# Altium PCB power_2023-07-21.pcbdoc
Units mil, origin at the board's own origin, x right, y up, seen from the top; angles counter-clockwise.
Board outline 2965 x 2770 mil, 2 copper layers (Top Layer, Bottom Layer); 54 components, 28 nets, 150 pads, 197 vias.
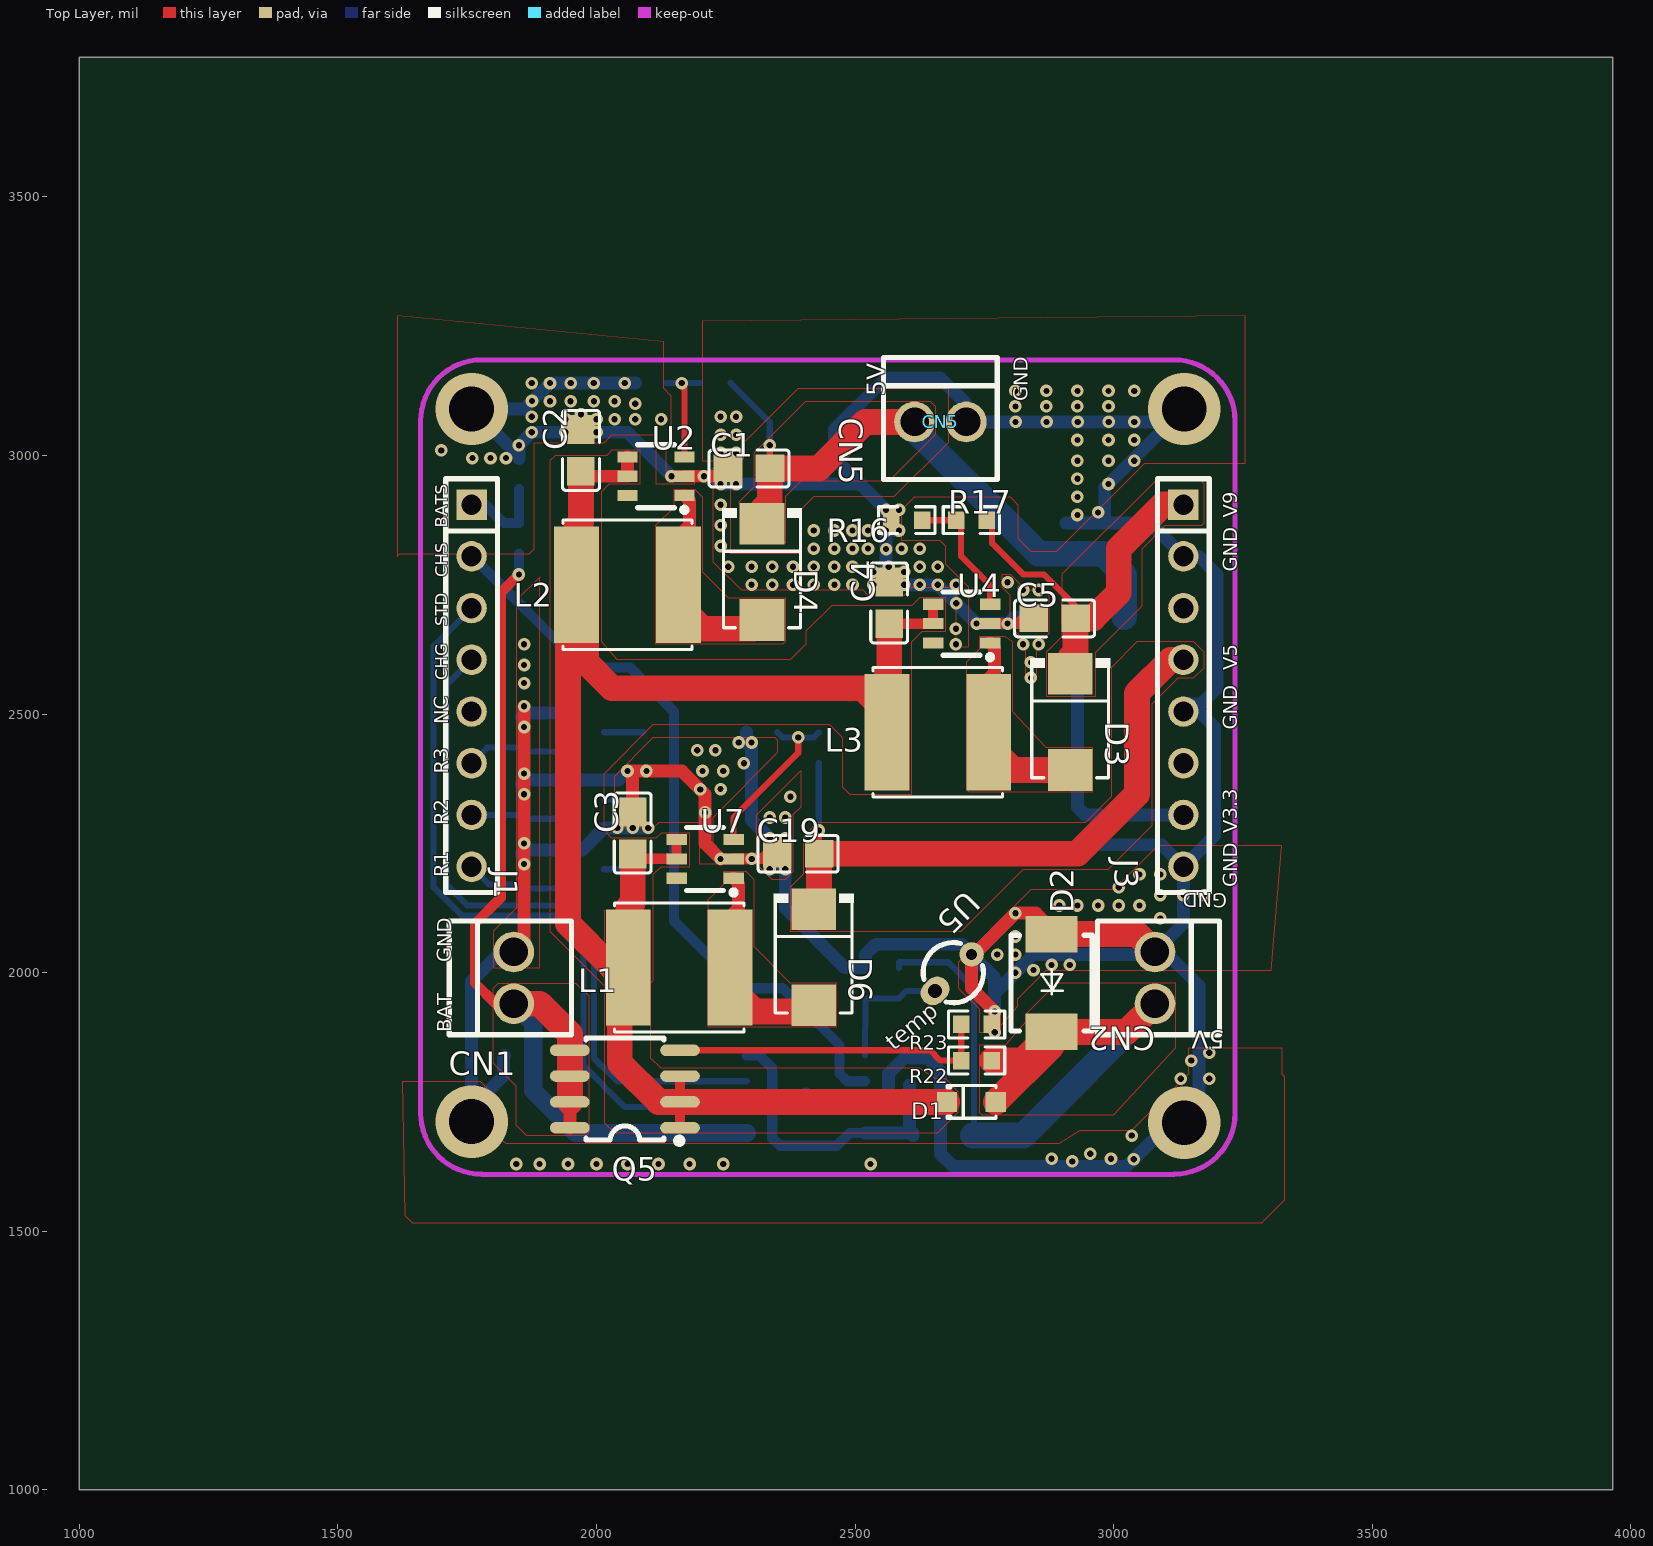
[diagram p0: Top Layer view]
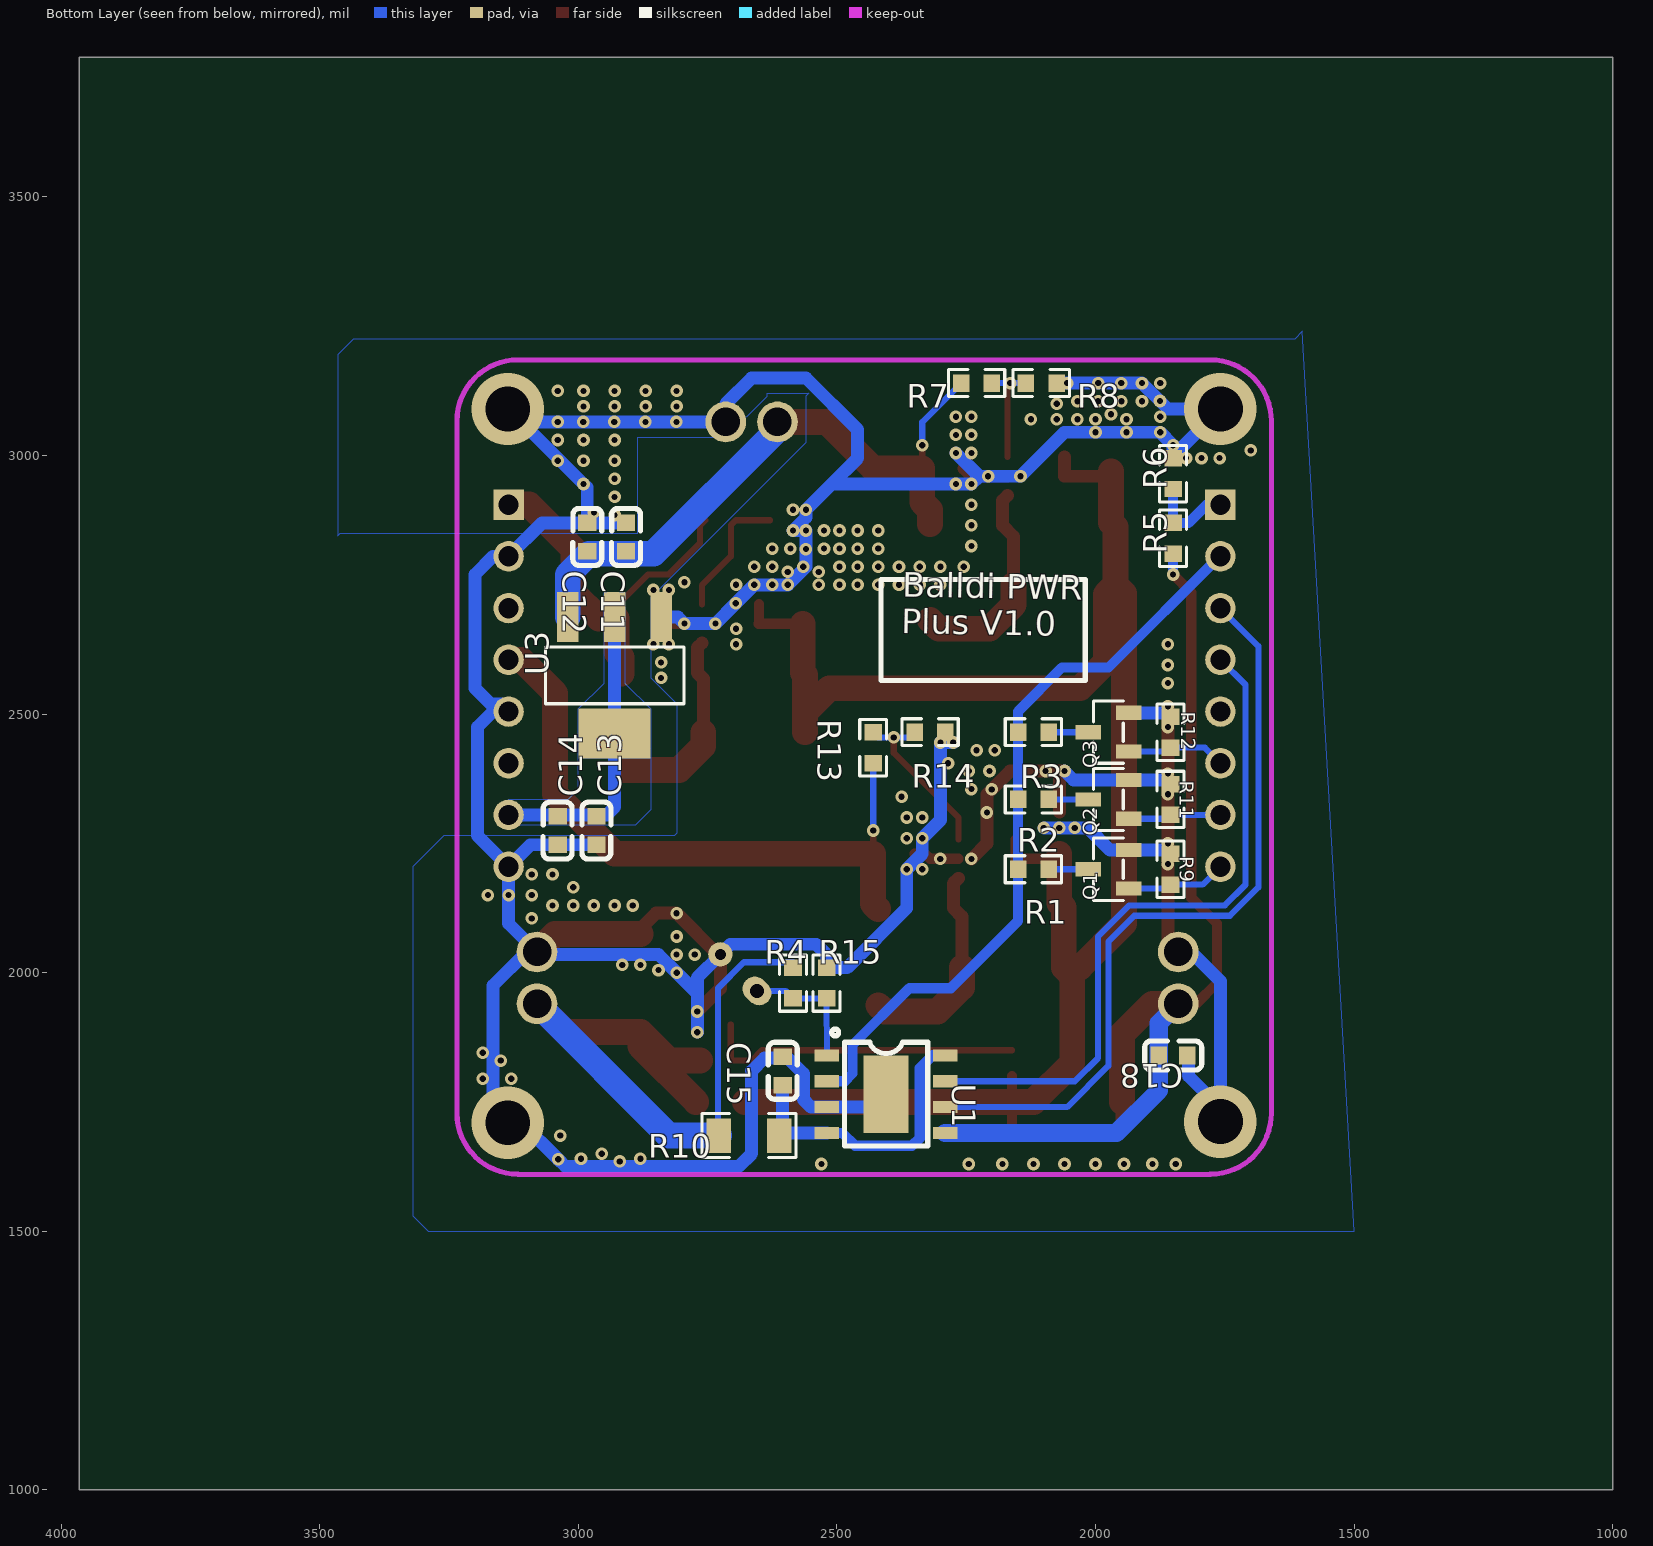
[diagram p1: Bottom Layer view, seen from below]

## Layer stack, top to bottom
Top Layer: signal copper (thickness not stored)
Dielectric: dielectric 12.6, FR-4, Dk 4.8
Bottom Layer: signal copper (thickness not stored)

## Board outline
3965,1000 1000,1000 1000,3770 3965,3770

## Components (designator, comment, footprint, x,y, rotation, side; value= is the part's Value field where it differs from the comment)
C1 "22uF" C0805 2295,2975 r180 top
C2 "22uF" C0805 1970,3010 r90 top
C3 "22uF" C0805 2070,2270 r90 top
C4 "22uF" C0805 2566,2715 r90 top
C5 "22uF" C0805 2886,2685 r180 top
C11 "106" C0603 2907.91,2842.3 r90 bottom
C12 "104" C0603 2982.91,2842.3 r90 bottom
C13 "104" C0603 2965,2275 r270 bottom
C14 "106" C0603 3040,2275 r270 bottom
C15 "106" C0603 2605,1810 r90 bottom
C18 "106" C0603 1850,1840 r180 bottom
C19 "22uF" C0805 2390,2230 r180 top
CN1 "640454-2" CONN-TH_640454-2 1840,1990 r270 top
CN2 "640454-2" CONN-TH_640454-2 3080,1990 r90 top
CN5 "640454-2" CONN-TH_640454-2 2665,3065 r180 top
D1 "BAT60AE6327" SOD-323_L1.8-W1.3-LS2.5-FD 2725,1750 r180 top
D2 "SMBJ5.0A_C10204" SMB_L4.6-W3.6-LS5.3-R-RD 2880,1980 r90 top
D3 "SS34BG" SMB_L4.6-W3.6-LS5.3-RD 2916,2485 r270 top
D4 "SS34BG" SMB_L4.6-W3.6-LS5.3-RD 2320,2775 r270 top
D6 "SS34BG" SMB_L4.6-W3.6-LS5.3-RD 2420,2030 r270 top
J1 "Header2.54mm 1*8P" HDR-TH_8P-P2.54-V-M 1758.42,2555 r270 top
J3 "Header2.54mm 1*8P" HDR-TH_8P-P2.54-V-M 3135,2555 r270 top
L1 "22uH" IND-SMD_L6.0-W6.0 2160,2010 r0 top
L2 "22uH" IND-SMD_L6.0-W6.0 2060,2750 r0 top
L3 "22uH" IND-SMD_L6.0-W6.0 2660,2465 r0 top
Q1 "2N7002-TP" SOT-23-3_L2.9-W1.3-P1.90-LS2.4-BR 1975,2200 r0 bottom
Q2 "2N7002-TP" SOT-23-3_L2.9-W1.3-P1.90-LS2.4-BR 1975,2335 r0 bottom
Q3 "2N7002-TP" SOT-23-3_L2.9-W1.3-P1.90-LS2.4-BR 1975,2465 r0 bottom
Q5 "AO4485" SOIC-8_L5.0-W4.0-P1.27-LS6.0-BL 2055,1775 r90 top
R1 "2K" R0603#1 2120,2200 r0 bottom
R2 "5K1" R0603#1 2120,2335 r0 bottom
R3 "10K" R0603#1 2120,2465 r0 bottom
R4 "2.7K" R0603#1 2585,1980 r90 bottom
R5 "10K" R0603#1 1850,2840 r270 bottom
R6 "20K" R0603#1 1850,2965 r270 bottom
R7 "75K" R0603#1 2230,3140 r180 bottom
R8 "10K" R0603#1 2105,3140 r0 bottom
R9 "10K" R0603#1 1855,2200 r270 bottom
R10 "0.4" R1206 2670,1685 r0 bottom
R11 "10K" R0603#1 1855,2335 r270 bottom
R12 "10K" R0603#1 1855,2465 r270 bottom
R13 "75" R0603#1 2430,2435 r90 bottom
R14 "10K" R0603#1 2320,2465 r0 bottom
R15 "16K" R0603#1 2520,1980 r270 bottom
R16 "10K" R0603#2 2600,2875 r180 top
R17 "191K" R0603#2 2725,2875 r0 top
R22 "10K" R0603#2 2735,1830 r180 top
R23 "33K" R0603#2 2735,1900 r0 top
U1 "TP4056" ESOP-8_L4.9-W3.9-P1.27-LS6.0-BL-EP 2405,1765 r90 bottom
U2 "SX1308" SOT-23-6_L2.9-W1.6-P0.95-LS2.8-BR 2115,2960 r0 top
U3 "BL9110-330BPFB" SOT-223_L6.5-W3.5-P2.30-LS7.0-BR 2930,2575 r270 bottom
U4 "SX1308" SOT-23-6_L2.9-W1.6-P0.95-LS2.8-BR 2706,2675 r0 top
U5 "NTC/10K" RES-TH_BD2.8_NTC-10K 2690,2000 r225 top
U7 "SX1308" SOT-23-6_L2.9-W1.6-P0.95-LS2.8-BR 2210,2220 r0 top

## Footprints (in the part's own frame and the unit in brackets; to place one, negate y for a bottom-side part, rotate by r counter-clockwise, add the part's x,y. Pads: shape width x height; smd on the part's side, far side on the other; paste and mask are expansions set on the pad)
C0603 [mm]
  rect 0.8x0.9 smd paste+0 mask+0.051: 1(0.7,0) 2(-0.7,0)
  silkscreen extent -1.39,-0.72 1.41,0.71
C0805 [mm]
  rect 1.41x1.35 smd paste-100 mask+0.051: 1(-1.03,0) 2(1.03,0)
  silkscreen extent -1.96,-0.9 1.96,0.9
CONN-TH_640454-2 [mm]
  round 2 hole 1.4 paste+0 mask+0.051: 1(-1.27,0) 2(1.27,0)
  silkscreen extent -2.79,-3.17 2.79,2.83
ESOP-8_L4.9-W3.9-P1.27-LS6.0-BL-EP [mm]
  rect 0.6x1.2 smd paste+0 mask+0.051: 1(1.905,2.908) 2(0.635,2.908) 3(-0.635,2.908) 4(-1.905,2.908) 5(-1.905,-2.908) 6(-0.635,-2.908) 7(0.635,-2.908) 8(1.905,-2.908)
  rect 3.8x2.2 smd paste+0 mask+0.051: 9(0,0)
  silkscreen extent -2.55,-2.05 3.2,2.67
HDR-TH_8P-P2.54-V-M [mm]
  rect 1.5x1.5 hole 1 paste+0 mask+0.051: 1(-8.89,0)
  round 1.5 hole 1 paste+0 mask+0.051: 2(-6.35,0) 3(-3.81,0) 4(-1.27,0) 5(1.27,0) 6(3.81,0) 7(6.35,0) 8(8.89,0)
  silkscreen extent -10.16,-1.27 10.16,1.27
IND-SMD_L6.0-W6.0 [mm]
  rect 2.2x5.72 smd paste+0 mask+0.051: 1(-2.5,0) 2(2.5,0)
  silkscreen extent -3.18,-3.18 3.18,3.18
R0603#1 [mil]
  rect 31.75x34.02 smd paste-3937.01 mask+2: 1(29.66,0) 2(-29.66,0)
  silkscreen extent -55,-26 55,26
R0603#2 [mil]
  rect 31.75x34.02 smd paste-3937.01 mask+2: 1(-29.66,0) 2(29.66,0)
  silkscreen extent -55,-26 55,26
R1206 [mil]
  rect 47.54x66.97 smd paste-3937.01 mask+2: 1(58.22,0) 2(-58.22,0)
  silkscreen extent -91,-42 91,42
RES-TH_BD2.8_NTC-10K [mm]
  round 1.2 hole 0.55 paste+0 mask+0.05: 1(-1.27,0)
  oval 1.5x1.2 hole 0.7 paste+0 mask+0.05: 2(1.27,0)
  silkscreen extent -1.27,-1.48 1.27,1.48
SMB_L4.6-W3.6-LS5.3-R-RD [mm]
  rect 1.8x2.54 smd paste+0 mask+0.051: 1(2.4,0) 2(-2.4,0)
  silkscreen extent -2.35,-2 2.35,2
SMB_L4.6-W3.6-LS5.3-RD [mil]
  rect 80.61x86.31 smd paste+0 mask+2: 1(-92.94,0) 2(92.94,0)
  silkscreen extent -123,-77 108,77
SOD-323_L1.8-W1.3-LS2.5-FD [mm]
  rect 1x1 smd paste+0 mask+0.051: 1(-1.2,0) 2(1.2,0)
  silkscreen extent -1.2,-0.8 1.2,0.8
SOIC-8_L5.0-W4.0-P1.27-LS6.0-BL [mil]
  oval 22.38x76.78 smd paste+0 mask+2: 1(-75,-106.5) 2(-25,-106.5) 3(25,-106.5) 4(75,-106.5) 5(75,106.5) 6(25,106.5) 7(-25,106.5) 8(-75,106.5)
  silkscreen extent -106,-111 98,75
SOT-23-3_L2.9-W1.3-P1.90-LS2.4-BR [mm]
  rect 1.25x0.7 smd paste+0 mask+0.051: 1(-1,0.95) 2(-1,-0.95) 3(1,0)
  silkscreen extent -0.73,-1.53 0.73,1.53
SOT-23-6_L2.9-W1.6-P0.95-LS2.8-BR [mm]
  rect 1x0.55 smd paste+0 mask+0.051: 1(1.4,-0.95) 2(1.4,0) 3(1.4,0.95) 4(-1.4,0.95) 5(-1.4,0) 6(-1.4,-0.95)
  silkscreen extent -0.9,-1.78 1.52,1.55
SOT-223_L6.5-W3.5-P2.30-LS7.0-BR [mm]
  rect 2.465x1.05 smd paste+0 mask+0.051: 1(-2.857,2.3) 2(-2.857,0) 3(-2.858,-2.3)
  rect 2.465x3.54 smd paste+0 mask+0.051: 4(2.857,0)
  silkscreen extent -1.4,-3.4 1.4,3.4

## Via types
v1: diameter 24.41, hole 12, Top Layer to Bottom Layer, tented both sides, 193 vias
v2: diameter 140, hole 86.61, Top Layer to Bottom Layer, tented both sides, 4 vias

## Nets (pads, with @x,y where several pads share a name; then routed paths per layer and width w, separated by ;. In a path a pad name is that pad's centre, name@x,y a point inside that pad or via, vN(x,y) a via of type N, cw(c..) or ccw(c..) an arc to the next point about the centre after c; other vN are vias at no path point)
BAT3.7: C18.2 CN1.2 Q5.5 Q5.6 Q5.7 Q5.8 R5.1 U1.5 | length 1901.5
  Top Layer w19.68: CN1.2 1805,1940 1765,1980 1765,2095 1815,2145 1815,2735 v1(1850,2770)
  Top Layer w25: Q5.8 Q5.7
  Top Layer w50: CN1.2 1890,1940 1948.5,1881.5 Q5.7
  Bottom Layer w19.68: v1(1850,2770) R5.1
  Bottom Layer w35.43: CN1.2 1877.56,1902.44 C18.2 ; C18.2 1877.6,1772.4 1960,1690 U1.5
BAT_SAMPLE: J1.1 R5.2 R6.1 | length 171.8
  Bottom Layer w19.68: J1.1 1785,2905 1820,2870 R5.2 ; R5.2 R6.1
CHRG1: J1.4 U1.7 | length 1330.6
  Bottom Layer w12.01: J1.4 1710,2556.6 1710,2170 1750,2130 1935,2130 1995,2070 1995,1835 2040,1790 U1.7
CHRG_SAMPLE: J1.2 R1.1 R2.1 R3.1 U1.2 | length 1451
  Bottom Layer w19.68: J1.2 1760,2805 1975,2590 2065,2590 2149.7,2505.3 R3.1 ; R1.1 R3.1 ; R1.1 2149.7,2100.3 2280,1970 2360,1970 2470,1860 2470,1805 2485,1790 U1.2
GND: C1.2 C2.2 C3.2 C4.2 C5.2 C11.1 C12.1 C13.1 C14.1 C15.1 C18.1 C19.2 CN1.1 CN2.2 CN5.1 D2.1 J3.2 J3.5 J3.8 Q1.2 Q2.2 Q3.2 R6.2 R8.2 R9.2 R11.2 R12.2 R14.2 R15.2 R16.2 R23.2 U1.3 U1.9 U2.2 U3.1 U4.2 U5.1 U7.2 | length 10161.7
  Top Layer w20: U7.2 v1(2300.3,2220) 2320,2220 2330,2230 C19.2 ; U4.2 v1(2795,2675) 2815,2675 2825,2685 C5.2@2845.45,2685
  Top Layer w25: CN1.1 1860,2060 v1(1860,2210) v1(1860,2515) ; C3.2 2070,2380 v1(2060,2390) v1(2096.45,2390) 2134.59,2390 2165,2390 v1(2200.65,2354.35) 2210,2345 v1(2210,2309.78) 2210,2250 v1(2240,2220) ; U2.2 v1(2207.63,2960) 2239.45,2960 C1.2 ; v1(2770,1885) v1(2770,1925) 2725.36,1969.64 U5.1 2730.35,2035.35 v1(2810,2115) 2850,2115 2880,2085 D2.1
  Top Layer w50: D2.1 3045.52,2074.49 CN2.2
  Bottom Layer w25: v2@1758.4,1712.1 1758.4,1983.4 1815,2040 CN1.1 ; v2(1758.43,1712.05) 1758.43,1738.43 1820,1800 1820,1837.56 C18.1 ; R9.2 1862.74,2237.4 Q1.2 1972.4,2237.4 2015,2280 v1(2100,2280) ; R11.2 1862.74,2372.4 Q2.2 2042.4,2372.4 v1(2060,2390) ; R12.2 1862.74,2502.4 Q3.2 ; R8.2 v1(2054.58,3140) v1(1994.58,3140) v1(1950.3,3140) v1(1910,3140) v1(1875.35,3105.35) 1860,3090 v2(1758.43,3090) 1850,2998.43 R6.2 v1(1850,3020) v1(1875,3045) v1(2000,3045) 2060,3045 v1(2145,2960) 2225,2960 ; v1(2207.63,2960) 2225,2960 ; v1(2270,3005) 2225,2960 ; v1(2275,2445) v1(2300,2445) ; R14.2 2290.34,2454.66 v1(2300,2445) ; U1.9 2430,1740 U1.3 2550,1740 2565,1755 2565,1805 2597.56,1837.56 C15.1 ; C15.1 2607.6,1835 2640,1835 2665,1810 2665,1650 2690,1625 3025,1625 v1(3039.12,1639.12) 3110,1710 v2(3136.38,1710) 3165,1738.62 3165,1975 3100,2040 CN2.2 ; U3.1 2807.5,2687.5 v1(2795,2675) v1(2735,2675) v1(2695.74,2714.26) v1(2660,2750) v1(2625,2750) v1(2595,2750) 2560,2785 v1(2560,2819) v1(2560,2855) v1(2585,2855) 2560,2880 v1(2560,2895) 2510,2945 ; C11.1 C12.1 ; C13.1 C14.1 3092.56,2247.44 J3.8 ; 2225,2960 v1(2240,2945) 2510,2945 ; v1(2300,2445) 2300,2295 v1(2335,2260) ; 2335,2230 v1(2335,2260) ; 2335,2230 v1(2365,2200) ; 2335,2230 v1(2335,2260) ; 2335,2230 v1(2365,2200) ; v1(2365,2200) 2365,2125 2480.34,2009.66 R15.2 2520,2035 2540,2055 2705.71,2055 U5.1 2770,1990.71 v1(2770,1885) 2770,1960 v1(2809.92,1999.92) 2845,2035 3075.01,2035 CN2.2 ; 2510,2945 2460,2995 2460,3050 2560,3150 2665,3150 2715,3100 CN5.1 2810.45,3065 2840.45,3065 2870.45,3065 2900.45,3065 2930.45,3065 2960.45,3065 2990.45,3065 3020.45,3065 v1(3040.07,3065) 3111.38,3065 v2(3136.38,3090) 3135,3090 v1(2990,2945) 2982.91,2937.91 C12.1 ; C12.1 3070.14,2869.86 J3.2 3165,2805 3200,2770 3200,2550 3170,2520 3150,2520 J3.5 3165,2505 3195,2475 3195,2265 J3.8 ; CN2.2 3135,2094.99 J3.8
  other v1: 1845,1630 1890,1630 1945,1630 2000,1630 2060,1630 2120,1630 2180,1630 2245,1630 2530,1630 2920,1635 2880,1640 2995,1640 2955,1650 3035,1685 3130,1795 3185,1795 3150,1830 3185,1845 2845,2005 2880,2015 2915,2015 2775,2035 2810,2035 2810,2070 3090,2105 2895,2130 2930,2130 2970,2130 3010,2130 3050,2130 3090,2150 3135,2150 3175,2150 3010,2165 3050,2190 3090,2190 2335,2200 1860,2250 2365,2260 2040,2280 2070,2280 2335,2300 2365,2300 2375,2340 1860,2345 2240,2355 1860,2385 2205,2390 2245,2390 2285,2405 2195,2430 2230,2430 1860,2475 1860,2560 2840,2570 1860,2595 2840,2600 1860,2635 2695,2635 2825,2635 2855,2635 2695,2665 2825,2740 2855,2740 2300,2750 2340,2750 2380,2750 2420,2750 2460,2750 2495,2750 2535,2750 2695,2750 2795,2755 2535,2775 2595,2775 2255,2785 2300,2785 2340,2785 2380,2785 2420,2785 2460,2785 2495,2785 2565,2785 2625,2785 2660,2785 2420,2820 2460,2820 2495,2820 2525,2820 2590,2820 2625,2820 2240,2825 2420,2855 2460,2855 2495,2855 2525,2855 2240,2865 2930,2885 2970,2890 2585,2895 2240,2905 2930,2920 2270,2945 2930,2955 2930,2990 2990,2990 3040,2990 1760,2995 1795,2995 1825,2995 2240,3005 1700,3010 2930,3030 2990,3030 3040,3030 2240,3040 2270,3040 1940,3045 2810.45,3065 2870.45,3065 2930.45,3065 2990.45,3065 1940,3070 2000,3070 2035,3070 2075,3070 2125,3070 1875,3075 2240,3075 2270,3075 1970,3080 2810,3095 2870,3095 2930,3095 2990,3095 2075,3100 1910,3105 1950,3105 1995,3105 2035,3105 2810,3125 2870,3125 2930,3125 2990,3125 3040,3125 1875,3140
L1_2: D6.2 L1.2 U7.1 | length 407.8
  Top Layer w25: L1.2 2258.42,2108.42 2275,2125 2275,2172.72 U7.1
  Top Layer w50: L1.2 2258.42,1971.58 2305,1925 2407.94,1925 D6.2
L2_2: D4.2 L2.2 U2.1 | length 412
  Top Layer w25: L2.2 2158.42,2843.42 2180,2865 2180,2912.72 U2.1
  Top Layer w50: L2.2 2158.42,2711.58 2205,2665 2302.94,2665 D4.2
L3_2: D3.2 L3.2 U4.1 | length 384.3
  Top Layer w25: L3.2 2758.42,2568.42 2770,2580 2770,2628.72 U4.1
  Top Layer w50: L3.2 2758.42,2438.64 2805,2392.06 D3.2
POWER_IN: C2.1 C3.1 C4.1 D1.2 L1.1 L2.1 L3.1 Q5.1 Q5.2 Q5.3 U2.4 U2.5 U4.4 U4.5 U7.4 U7.5 | length 3623.8
  Top Layer w20: C3.1 2079.45,2220 U7.5 U7.4 ; Q5.1 Q5.3 ; C4.1@2566,2674.5 U4.5 U4.4
  Top Layer w25: C2.1 1979.45,2960 U2.5 U2.4
  Top Layer w50: C2.1 1970,2870 1961.57,2861.57 L2.1 ; C3.1 2070,2135 2061.57,2126.57 L1.1 ; C4.1 2566,2580 2561.57,2575.57 L3.1 2561.57,2503.43 2515,2550 2030,2550 1980,2600 1980,2731.57 L2.1 ; D1.2 Q5.2 2120,1750 2045,1825 2045,1993.43 L1.1 ; L2.1 1945,2733.43 1945,2095 2030,2010 L1.1
Q5_4: Q5.4 R22.2 R23.1 | length 622.1
  Top Layer w12.01: Q5.4 2645,1850 2665,1830 R22.2 R23.1
R1_2: Q1.3 R1.2 | length 76
  Bottom Layer w12.01: Q1.3 R1.2
R1_CTRL: J1.8 Q1.1 R9.1 | length 194.8
  Bottom Layer w12.01: J1.8 1793.09,2170.34 R9.1 1862.74,2162.6 Q1.1
R2_2: Q2.3 R2.2 | length 76
  Bottom Layer w12.01: Q2.3 R2.2
R2_CTRL: J1.7 Q2.1 R11.1 | length 180.4
  Bottom Layer w12.01: J1.7 R11.1 ; R11.1 1862.74,2297.6 Q2.1
R3_2: Q3.3 R3.2 | length 76
  Bottom Layer w12.01: Q3.3 R3.2
R3_CTRL: J1.6 Q3.1 R12.1 | length 193
  Bottom Layer w12.01: J1.6 1788.77,2435.34 R12.1 1862.74,2427.6 Q3.1
R10_2: C15.2 R10.2 U1.4 U1.8 | length 588.4
  Bottom Layer w20: U1.8 2315,1840 2340,1815 2340,1680 2355,1665 2465,1665 2490,1690 U1.4
  Bottom Layer w25: U1.4 2611.78,1690 R10.2 2605,1691.78 C15.2
R13_1: R13.1 R14.1 U7.3 | length 337.8
  Top Layer w12.01: U7.3 2265.12,2300.12 2390,2425 v1(2390,2455)
  Bottom Layer w12.01: R14.1 2359.66,2455 v1(2390,2455) 2420.34,2455 R13.1
R17_1: R16.1 R17.1 U4.3 | length 255.5
  Top Layer w12.01: R16.1 R17.1 2705,2865.34 2705,2805 2761.12,2748.88 U4.3
S$1126: 
STDBY1: J1.3 U1.6 | length 1492.5
  Bottom Layer w12.01: J1.3 1685,2631.6 1685,2165 1740,2110 1925,2110 1975,2060 1975,1820 2055,1740 U1.6
U1_1: R4.2 R15.1 U1.1 U5.2 | length 250.9
  Bottom Layer w12.01: U1.1 R15.1 ; R15.1 R4.2 2599.3,1964.64 U5.2
U2_3: R7.1 R8.1 U2.3 | length 210.4
  Top Layer w12.01: v1(2165,3140) 2170.12,3134.88 U2.3
  Bottom Layer w12.01: R8.1 R7.1
USB_5V_IN: CN2.1 D1.1 D2.2 R4.1 R10.1 R22.1 | length 1461.3
  Top Layer w50: R22.1 2824.49,1830 D2.2 ; D1.1 2880,1857.76 D2.2 ; CN2.1 3025.52,1885.51 D2.2
  Bottom Layer w12.01: R4.1 2585,2020 2680,2020 2730,1970 2730,1685 R10.1
  Bottom Layer w50: R10.1 2825.01,1685 CN2.1
VCC3.3: C13.2 C14.2 J3.7 U3.2 U3.4 | length 578.7
  Bottom Layer w25: U3.2 U3.4 2930,2320 2945,2305 J3.7
VCC5_CORE: C1.1 C11.2 C12.2 CN5.2 D4.1 R7.2 U3.3 | length 1245
  Top Layer w12.01: v1(2335,3020) C1.1@2335.5,2975
  Top Layer w50: D4.1 2320,2895 2335,2910 2335.5,2975 2430,2975 2520,3065 CN5.2
  Bottom Layer w12.01: R7.2 2335,3064.66 v1(2335,3020)
  Bottom Layer w50: CN5.2 2615,3050 2855,2810 2980,2810 3020.55,2769.45 U3.3
VCC5_MOTO: C19.1 D6.1 J3.4 R13.2 | length 1260.7
  Top Layer w12.01: v1(2430,2275) C19.1
  Top Layer w50: D6.1 2430.55,2133.49 C19.1 ; C19.1 2930,2230 3045,2345 3045,2540 3110,2605 J3.4
  Bottom Layer w12.01: v1(2430,2275) R13.2
VCC12: C5.1 D3.1 J3.1 R17.2 | length 745.4
  Top Layer w12.01: R17.2 2765,2864.66 2765,2830 2825,2770 2865,2770 2926.55,2708.45 C5.1
  Top Layer w50: D3.1 2916,2609.45 2926.55,2620 C5.1 2960,2685 3010,2735 3010,2820 3095,2905 J3.1
pads on no net: J1.5 J3.3 J3.6 U2.6 U4.6 U7.6

## Polygon pours and split planes (outlines as drawn)
USB_5V_IN on Top Layer (solid): 3080,1980 2890,1980 2830,1920 2830,1905 2790,1860 2775,1860 2740,1860 2740,1730 2745,1725 2930,1725 3000,1725 3120,1855 3120,1895 3120,1920 3120,1980
BAT3.7 on Top Layer (solid): 1800,1970 1810,1980 1960,1980 1985,1955 1985,1690 1980,1685 1865,1685 1845,1705 1845,1780 1800,1825 1800,1865
POWER_IN on Top Layer (solid): 2015,2120 2015,1710 2035,1690 2660,1690 2700,1730 2700,1770 2675,1795 2655,1795 2625,1815 2125,1815 2105,1835 2105,2120
POWER_IN on Top Layer (solid): 1910,2875 1910,2080 2020,1970 2020,1895 2110,1985 2110,2190 2125,2205 2180,2205 2180,2270 2125,2270 2115,2260 2030,2260 2015,2275 2015,2385 2110,2480 2450,2480 2475,2455 2475,2360 2490,2345 2610,2345 2610,2640 2630,2660 2675,2660 2675,2725 2625,2725 2610,2710 2455,2710 2405,2660 2405,2635 2375,2605 2040,2605 2010,2640 2010,2930 2025,2945 2085,2945 2085,3010 2030,3010 2020,3000 1920,3000 1910,2990 1910,2985
L3_2 on Top Layer (solid): 2740,2650 2740,2625 2715,2600 2715,2355 2720,2350 2960,2350 2960,2435 2930,2435 2870,2435 2805,2505 2805,2575 2805,2640 2790,2650 2765,2650
L2_2 on Top Layer (solid): 2365,2640 2360,2635 2115,2635 2115,2865 2150,2900 2150,2935 2190,2935 2205,2920 2205,2775 2255,2725 2365,2725
L1_2 on Top Layer (solid): 2245,2195 2245,2170 2215,2140 2215,1895 2465,1895 2465,1980 2375,1980 2305,2050 2305,2180 2290,2195 2260,2195
VCC5_CORE on Top Layer (solid): 2275,2910 2305,2940 2305,2945 2305,2955 2305,3005 2405,3105 2645,3105 2655,3095 2655,3040 2565,2950 2395,2950 2365,2920 2365,2830
VCC12 on Top Layer (solid): 2900,2715 2900,2660 2900,2650 2870,2620 2870,2535 2965,2535 2965,2620 3055,2710 3055,2820 3100,2865 3170,2865 3175,2870 3175,2945 3165,2955 3085,2955 2900,2770 2900,2675
VCC5_MOTO on Top Layer (solid): 2400,2260 2400,2190 2375,2165 2375,2080 2470,2080 2705,2080 2825,2200 2990,2200 3075,2285 3075,2520 3125,2570 3155,2570 3175,2590 3175,2620 3155,2640 3045,2640 2995,2590 2995,2340 2945,2290 2425,2290
GND on Top Layer (solid): 1845,2720 1845,2125 1800,2080 1800,2010 1890,2010 1890,2765
GND on Top Layer (solid): 2205,3260 2205,2990 2280,2990 2285,2995 2285,3025 2390,3130 2680,3130 2680,3025 2575,2920 2420,2920 2395,2895 2395,2810 2260,2810 2260,2960 2255,2965 2225,2965 2225,2950 2225,2795 2280,2740 2515,2740 2525,2730 2595,2730 2610,2745 2695,2745 2695,2625 2700,2630 2720,2630 2720,2745 2675,2790 2675,2825 2665,2835 2590,2835 2590,2895 2615,2920 2800,2920 2815,2905 2815,2840 2840,2815 2890,2815 3060,2985 3255,2985 3255,3270
GND on Top Layer (solid): 1615,3270 1615,2805 1620,2810 1870,2810 1880,2820 1880,3025 2015,3025 2030,3040 2115,3040 2115,2945 2190,2945 2190,2970 2135,2970 2135,3020 2145,3030 2145,3115 2130,3130 2130,3220
GND on Top Layer (solid): 2815,2740 2865,2740 2875,2730 2875,2710 2875,2655 2850,2630 2850,2565 2830,2565 2830,2625 2830,2640 2800,2670 2800,2730 2785,2745 2785,2770 2800,2770 2820,2750 2855,2750
GND on Top Layer (solid): 3325,2245 3085,2245 3005,2165 3000,2160 2840,2160 2700,2020 2700,1970 2740,1930 2740,1885 2770,1885 2815,1935 2815,1950 2870,2005 3305,2005
GND on Top Layer (solid): 2035,2280 2035,2380 2110,2455 2345,2455 2350,2450 2350,2425 2225,2300 2225,2230 2305,2230 2310,2235 2310,2305 2395,2390 2395,2320 2380,2305 2380,2280 2380,2195 2365,2180 2340,2180 2310,2210 2200,2210 2200,2290 2120,2290 2110,2280 2105,2280
GND on Top Layer (solid): 1625,1790 1775,1790 1810,1755 1810,1710 1805,1705 1805,1685 1825,1670 2895,1670 2935,1695 3035,1695 3145,1805 3145,1855 3325,1855 3325,1805 3330,1800 3330,1560 3285,1515 1645,1515 1630,1530
GND on Bottom Layer (solid): 1600,3240 1615,3225 3435,3225 3465,3195 3465,2845 3460,2850 2885,2850 2885,3035 2715,3035 2635,3115 2635,3120 2555,3120 2560,3115 2560,3025 2860,2725 2860,2570 2810,2520 2810,2270 2815,2265 3260,2265 3320,2205 3320,1530 3290,1500 1500,1500
VCC3.3 on Bottom Layer (solid): 2910,2735 2910,2640 2910,2560 2860,2510 2860,2415 3000,2415 3000,2510 2950,2560 2950,2735
VCC3.3 on Bottom Layer (solid): 2860,2435 2860,2315 2890,2285 3150,2285 3150,2320 3135,2335 3020,2335 3015,2340 3000,2355 3000,2430

## Keep-outs
Keep-Out Layer:
  lines w10: 1660,1728.31 ccw(c1778.11,1728.31) 1778.11,1610.2 ; 1660,3066.89 cw(c1778.11,3066.89) 1778.11,3185 ; 3116.69,1610.2 ccw(c3116.69,1728.31) 3234.8,1728.31 ; 3116.69,3185 cw(c3116.69,3066.89) 3234.8,3066.89

## Silkscreen, mask and mechanical layers (free items; w line width, h text height)
Top Overlay:
  text "5V" at 2557.72,3115 h35.43 r90
  text "GND" at 2833.78,3105 h27.56 r90
  text "CN5" at 2469.31,3073.42 h45 r270
  text "V9" at 3238.78,2880 h27.56 r90
  text "BATS" at 1711.81,2860 h23.62 r90
  text "GND" at 3238.78,2775 h27.56 r90
  text "CHS" at 1711.81,2765 h23.62 r90
  text "STD" at 1711.81,2670 h23.62 r90
  text "V5" at 3238.78,2585 h27.56 r90
  text "CHG" at 1711.81,2565 h23.62 r90
  text "NC" at 1713.78,2480 h27.56 r90
  text "GND" at 3238.78,2470 h27.56 r90
  text "R3" at 1713.78,2385 h27.56 r90
  text "R2" at 1713.78,2285 h27.56 r90
  text "V3.3" at 3238.78,2270 h27.56 r90
  text "R1" at 1713.78,2185 h27.56 r90
  text "GND" at 3238.78,2165 h27.56 r90
  text "GND" at 3220,2153.78 h27.56 r180
  text "GND" at 1718.78,2020 h27.56 r90
  text "5V" at 3215,1887.72 h35.43 r180
  text "BAT" at 1718.78,1885 h27.56 r90
  text "temp" at 2574.91,1847.76 h31.5 r39
Bottom Overlay:
  lines w10: 2020,2565 2415,2565 2415,2760 2020,2760 2020,2565
  text "Balldi PWR  / Plus V1.0" at 2375.41,2656.38 h47.24 r1